# Altium PCB TXRobot-Boutons.PCBDOC
Units mm, origin at the board's own origin, x right, y up, seen from the top; angles counter-clockwise.
Board outline 299.72 x 199.9 mm, 2 copper layers (Top Layer, Bottom Layer); 21 components, 11 nets, 65 pads, 9 vias.
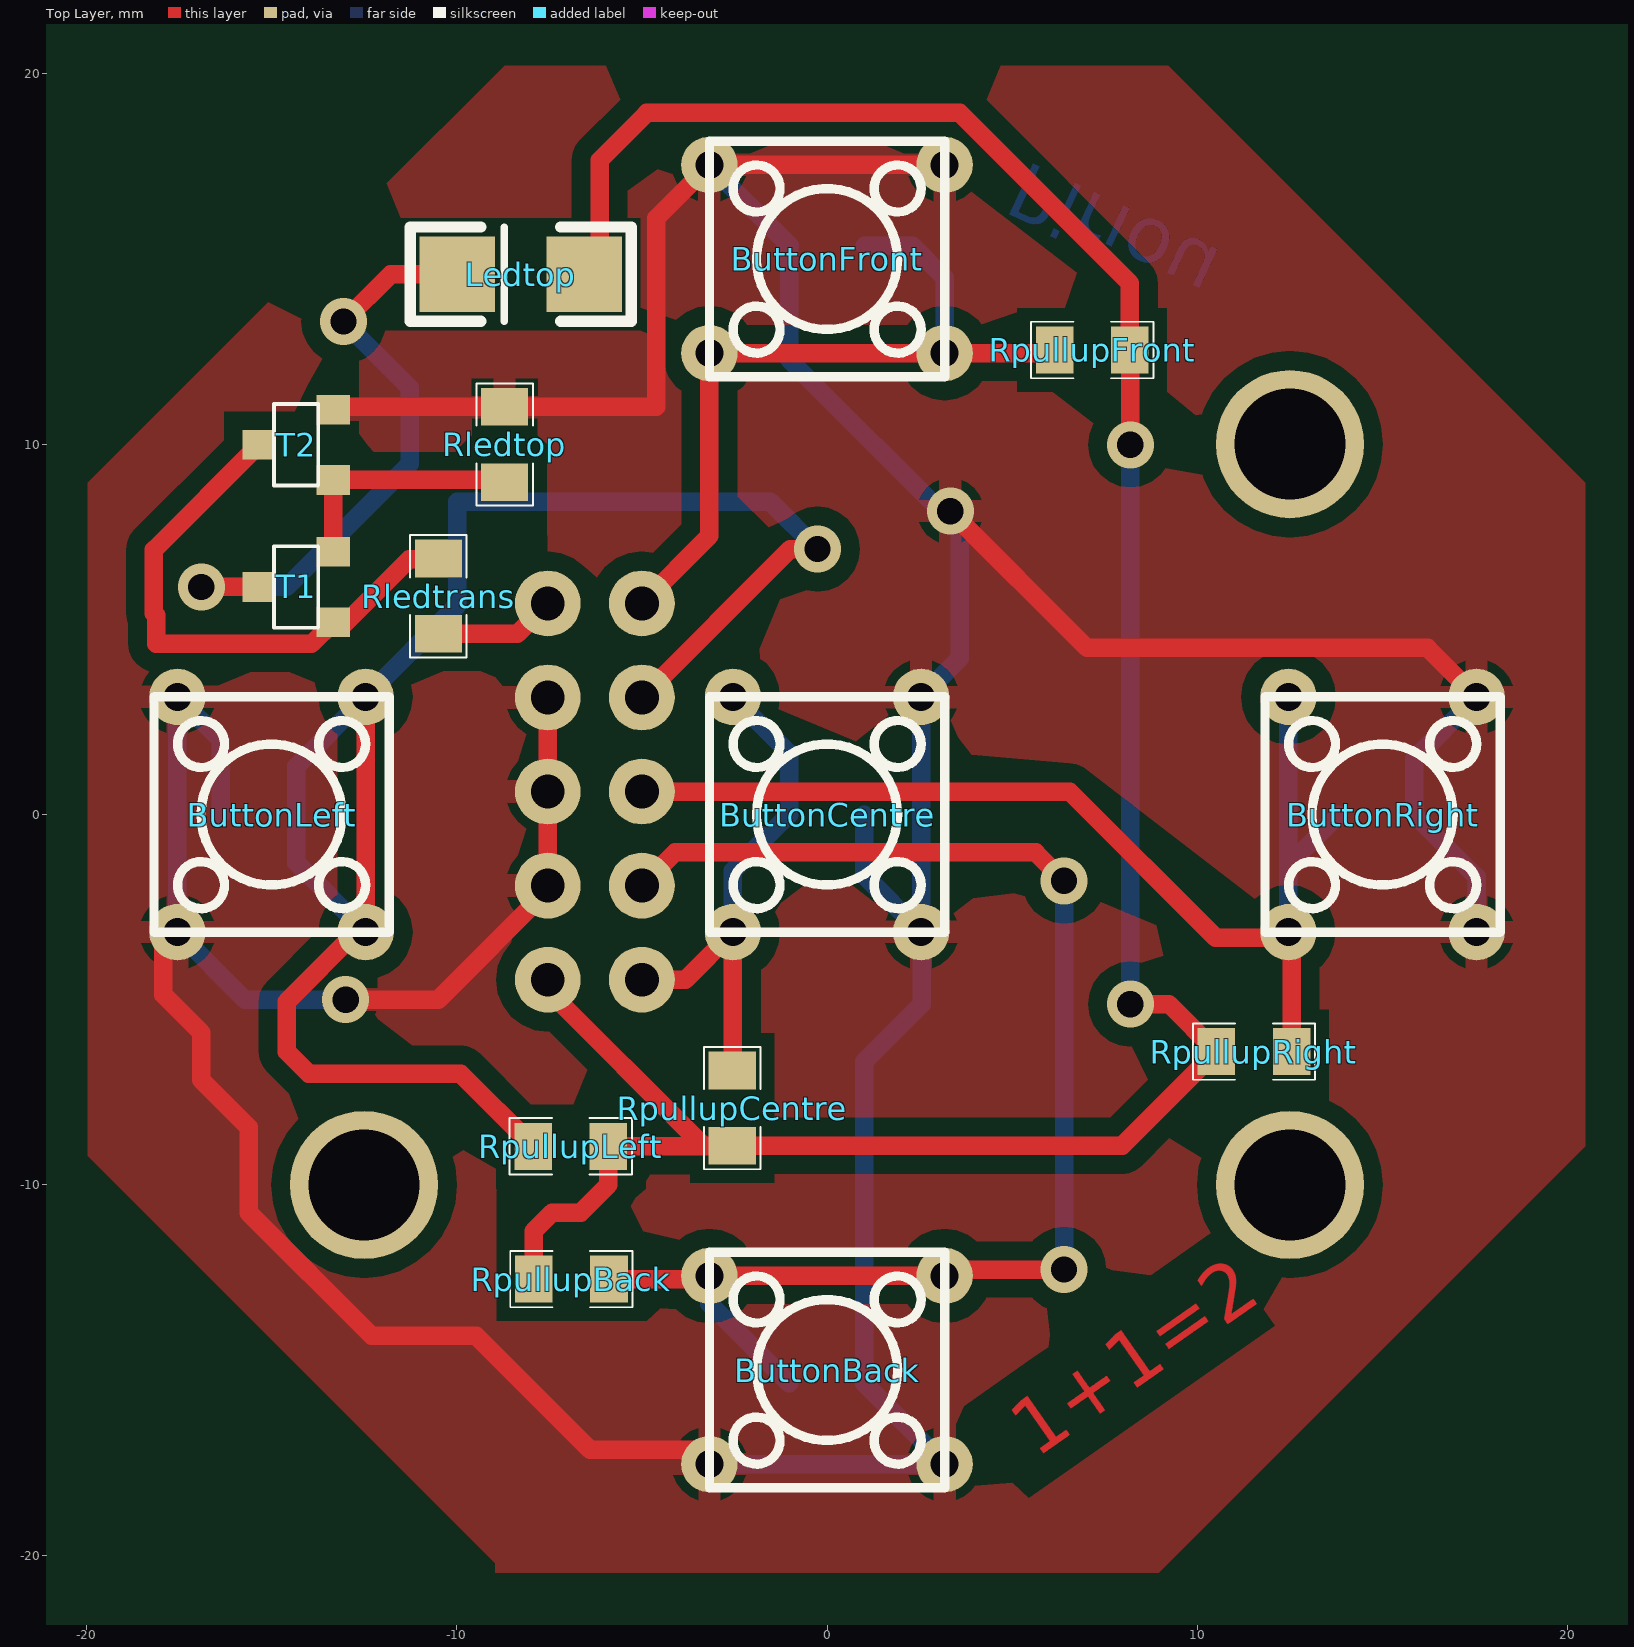
[diagram p0: Top Layer view]
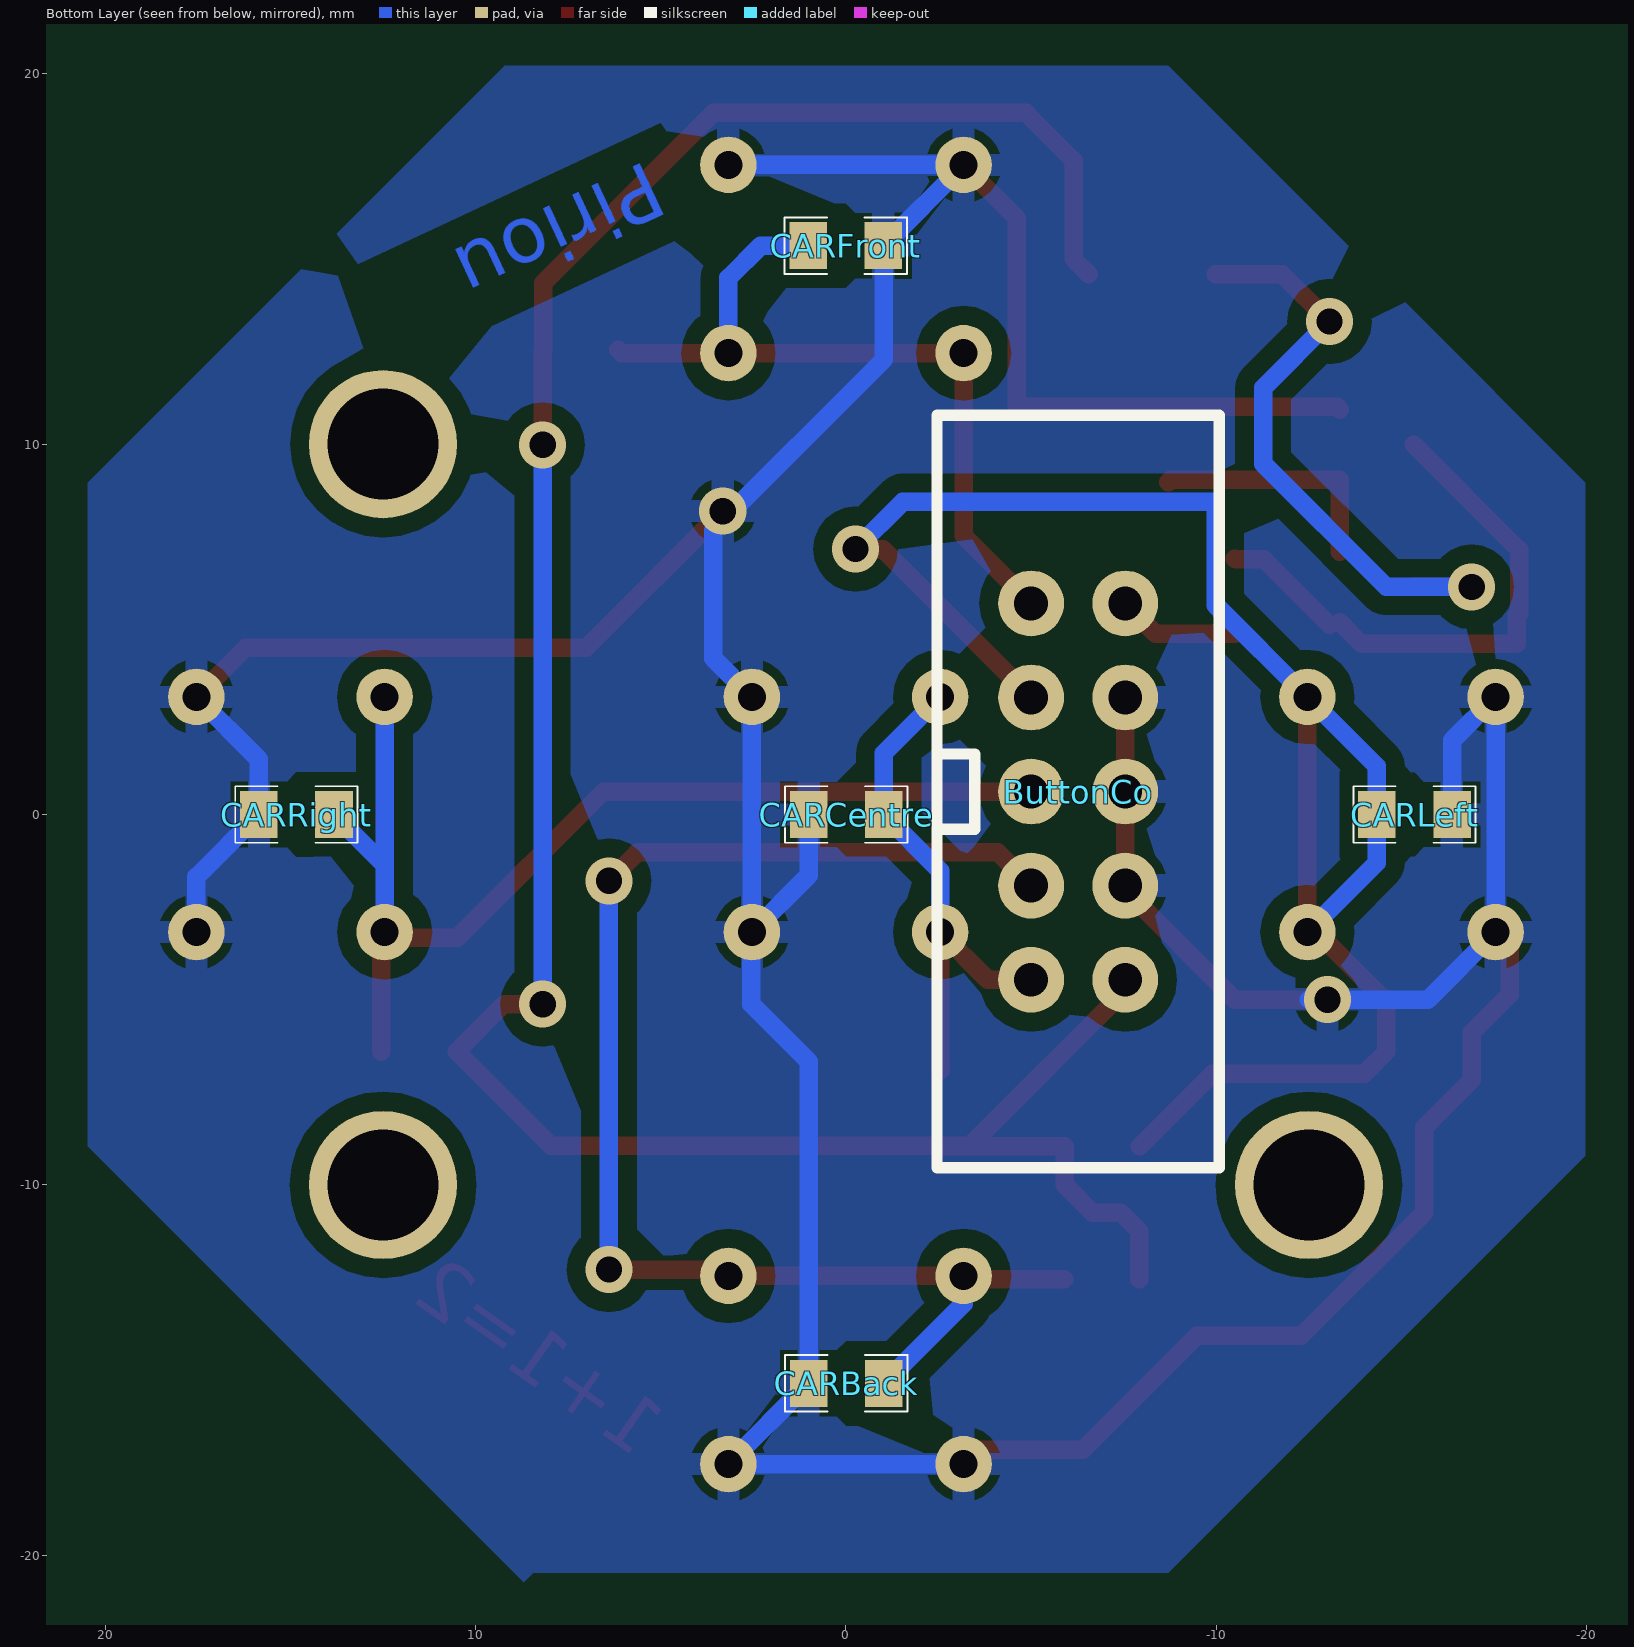
[diagram p1: Bottom Layer view, seen from below]

## Layer stack, top to bottom
Top Solder: solder mask 0.0102, Solder Resist, Dk 3.5
Top Layer: signal copper 0.0356
Dielectric1: dielectric 0.32, FR-4, Dk 4.8
Bottom Layer: signal copper 0.0356
Bottom Solder: solder mask 0.0102, Solder Resist, Dk 3.5

## Board outline
-141.655,-46.39 158.065,-46.39 158.065,153.508 -141.655,153.508

## Design rules (kind name [scope] priority, off if disabled: settings)
Clearance Clearance_bottom_polygon [OnLayer('Bottom Layer') Or OnLayer('Multi-Layer') vs OnLayer('Bottom Layer')  And  InPoly] p1: gap=0.508
Clearance Clearance_top_polygon [OnLayer('Top Layer')  Or OnLayer('Multi-Layer') vs OnLayer('Top Layer') And InPoly] p2: gap=0.508
Clearance Clearance_bottom [OnLayer('Bottom Layer') Or OnLayer('Multi-Layer') vs OnLayer('Bottom Layer')  And Not InPoly] p3: gap=0.203
Clearance Clearance_top [OnLayer('Top Layer')  Or OnLayer('Multi-Layer') vs OnLayer('Top Layer') And Not InPoly] p4: gap=0.203
Clearance Clearance_pad_to_pad [OnLayer('Multi-Layer') vs OnLayer('Multi-Layer')] p5: gap=0.254
ComponentClearance ComponentClearance_bottom [OnLayer('Bottom Overlay') vs OnLayer('Bottom Overlay')] p1: gap=0 collisioncheckmode=3 verticalgap=0.254 showdistances=FALSE
ComponentClearance ComponentClearance_top [OnLayer('Top Overlay') vs OnLayer('Top Overlay')] p2: gap=0 collisioncheckmode=3 verticalgap=0.254 showdistances=FALSE
FabricationTestPointUsage TestPointUsage [All] p1: valid=0 allowmultiple=FALSE
FabricationTestpoint Testpoint [All] p1: side=3 testpointundercomponent=TRUE minsize=1.016 maxsize=2.54 preferedsize=1.524 minholesize=0 maxholesize=1.016 preferedholesize=0.813 testpointgrid=0.025 allowsidetop=TRUE allowsidebottom=TRUE usegrid=TRUE gridtolerance=0
HoleSize [All] p1: absolutevalues=TRUE maxlimit=25.4 minlimit=0.406 maxpercent=80.000 minpercent=20.000
MinimumAnnularRing [PadXSize_AllLayers = PadYSize_AllLayers] p1: minimumring=0.254
PermittedLayers [All] p1: toplayerpermitted=TRUE bottomlayerpermitted=TRUE
PolygonConnect [All] p1: connectstyle=Relief reliefconductorwidth=0.61 reliefentries=4 polygonreliefangle="90 Angle" airgapwidth=0.254
RoutingVias [All] p1: holewidth=0.406 width=0.813 viastyle="Through Hole" minholewidth=0.4 minwidth=0.8 maxholewidth=0.6 maxwidth=10
SMDToPlane [All] p1: distance=0
SolderMaskExpansion [All] p1: expansion=0.102
ViasUnderSMD [All] p1: allowed=FALSE
Width Width_botom_top [OnLayer('Bottom Layer') or OnLayer('Top Layer')] p1: maxlimit=254 minlimit=0.5 preferedwidth=0.813 minimp=50.000000 maximp=50.000000 favimp=50.000000
25 further rules are at their usual default settings.

## Components (designator, comment, footprint, x,y, rotation, side; value= is the part's Value field where it differs from the comment)
ButtonBack "SwitchButton" SwitchMedium 0,-15 r0 top
ButtonCentre "SwitchButton" SwitchMedium 0,0 r90 top
ButtonCo "comment" HE10-10V -5,5.7 r180 bottom
ButtonFront "SwitchButton" SwitchMedium 0,15 r180 top
ButtonLeft "SwitchButton" SwitchMedium -15,0 r270 top
ButtonRight "SwitchButton" SwitchMedium 15,0 r90 top
CARBack "CAP" 0805 -1.024,-15.36 r0 bottom
CARCentre "CAP" 0805 -1.024,0 r0 bottom
CARFront "CAP" 0805 1.024,15.36 r180 bottom
CARLeft "CAP" 0805 -14.336,0 r180 bottom
CARRight "CAP" 0805 13.824,0 r0 bottom
Ledtop "comment" LED1206 -9.984,14.592 r0 top
Rledtop "RES" 0805 -8.704,11.008 r270 top
Rledtrans "RES" 0805 -10.496,6.912 r270 top
RpullupBack "RES" 0805 -5.888,-12.544 r180 top
RpullupCentre "RES" 0805 -2.56,-6.912 r270 top
RpullupFront "RES" 0805 6.144,12.544 r0 top
RpullupLeft "RES" 0805 -7.936,-8.96 r0 top
RpullupRight "RES" 0805 12.544,-6.4 r180 top
T1 "Transistors" BC817-40 -14.336,6.144 r270 top
T2 "Transistors" BC817-40 -14.336,9.984 r270 top

## Footprints (in the part's own frame and the unit in brackets; to place one, negate y for a bottom-side part, rotate by r counter-clockwise, add the part's x,y. Pads: shape width x height; smd on the part's side, far side on the other; paste and mask are expansions set on the pad)
0805 [mil]
  rect 40x50 smd: 1(0,0) 2(80,0)
  silkscreen extent -25,-30 105,30
BC817-40 [mm]
  rect 0.8x0.9 smd: 1(0.95,1) 2(-0.95,1) 3(0,-1)
  silkscreen extent -1.1,-0.6 1.1,0.6
HE10-10V [mil]
  round 70 hole 36: 1(0,0) 2(100,0) 3(0,-100) 4(100,-100) 5(0,-200) 6(100,-200) 7(0,-300) 8(100,-300) 9(0,-400) 10(100,-400)
  silkscreen extent -100,-600 200,200
LED1206 [mil]
  rect 80x80 smd: A(135,0) K(0,0)
  silkscreen extent -50,-50 185,50
SwitchMedium [mil]
  round 60 hole 30: 1(-125,100) 2(125,100) 3(125,-100) 4(-125,-100)
  silkscreen extent -125,-125 125,125

## Part data
ButtonCo: library part HE10-10, "10-pin connector"
CARBack CARCentre: "Capa anti rebond"
CARFront CARLeft CARRight: "capa Anti rebond"
Ledtop: library part LED, "LED 5mm/3mm/CMS"
Rledtop Rledtrans RpullupBack RpullupCentre RpullupFront RpullupLeft RpullupRight: "resistance"

## Free pads (board coordinates)
  round 4 hole 3: 0(-12.5,-10) 0(12.5,-10) 0(12.5,10)

## Via types
v1: diameter 1.27, hole 0.711, Top Layer to Bottom Layer, 9 vias

## Nets (pads, with @x,y where several pads share a name; then routed paths per layer and width w, separated by ;. In a path a pad name is that pad's centre, name@x,y a point inside that pad or via, vN(x,y) a via of type N, cw(c..) or ccw(c..) an arc to the next point about the centre after c; other vN are vias at no path point)
GND: ButtonBack.3 ButtonBack.4 ButtonCentre.3 ButtonCentre.4 ButtonCo.4 ButtonCo.6 ButtonCo.8 ButtonFront.3 ButtonFront.4 ButtonLeft.3 ButtonLeft.4 ButtonRight.3 ButtonRight.4 CARBack.2 CARCentre.2 CARFront.2 CARLeft.2 CARRight.2 Rledtop.1 T2.2 | length 154.3
  Top Layer w0.5: ButtonLeft.3 -17.92,-3.555 -17.92,-4.864 -16.896,-5.888 -16.896,-7.168 -15.616,-8.448 -15.616,-10.752 -12.288,-14.08 -9.472,-14.08 -6.4,-17.152 -3.563,-17.152 ButtonBack.4 ; T2.2 -13.262,11.008 Rledtop.1 -4.608,11.008 -4.608,16.107 ButtonFront.3 ButtonFront.4 ; v1(-13,-5) -10.5,-5 -7.54,-2.04 ButtonCo.6 ButtonCo.4 ; v1(3.328,8.192) 7.02,4.5 16.215,4.5 ButtonRight.3
  Bottom Layer w0.5: CARLeft.2 -16.368,2.003 ButtonLeft.4 ButtonLeft.3 -15.715,-5 v1@-12.5,-5 ; ButtonBack.4 ButtonBack.3 3.175,-17.527 CARBack.2 1.008,-6.672 2.56,-5.12 2.56,-3.195 ButtonCentre.4 ; CARCentre.2 1.008,-1.643 ButtonCentre.4 ; ButtonFront.4 ButtonFront.3 -3.175,17.527 CARFront.2 -1.024,15.344 -1.024,12.288 3.584,7.68 3.584,4.219 ButtonCentre.3 ButtonCentre.4 ; ButtonRight.4 17.54,-1.684 CARRight.2 15.856,1.491 ButtonRight.3
LED: ButtonCo.2 Rledtrans.2 | length 3.3
  Top Layer w0.5: Rledtrans.2 -8.36,4.88 ButtonCo.2
NetButtonBack_1: ButtonBack.1 ButtonBack.2 ButtonCo.7 CARBack.1 RpullupBack.1 | length 38.8
  Top Layer w0.5: RpullupBack.1 -3.259,-12.544 ButtonBack.1 ButtonBack.2 3.347,-12.288 v1(6.4,-12.288) ; ButtonCo.7 -4.104,-1.024 5.632,-1.024 v1(6.4,-1.792)
  Bottom Layer w0.5: ButtonBack.1 -3.175,-13.209 CARBack.1 ; v1(6.4,-12.288) v1(6.4,-1.792)
NetButtonCentre_1: ButtonCentre.1 ButtonCentre.2 ButtonCo.9 CARCentre.1 RpullupCentre.1 | length 14.3
  Top Layer w0.5: ButtonCo.9 -3.825,-4.46 ButtonCentre.1 -2.54,-6.892 RpullupCentre.1
  Bottom Layer w0.5: ButtonCentre.1 -2.54,-1.516 CARCentre.1 -1.024,1.659 ButtonCentre.2
NetButtonCo_1: ButtonCo.1 ButtonFront.1 ButtonFront.2 CARFront.1 RpullupFront.1 | length 21.4
  Top Layer w0.5: ButtonCo.1 -3.175,7.525 ButtonFront.2 ButtonFront.1 6.06,12.46 RpullupFront.1
  Bottom Layer w0.5: CARFront.1 2.304,15.36 3.175,14.489 ButtonFront.1
NetButtonCo_3: ButtonCo.3 ButtonLeft.1 ButtonLeft.2 CARLeft.1 RpullupLeft.1 | length 49.2
  Top Layer w0.5: ButtonLeft.1 ButtonLeft.2 -12.714,-3.175 -14.592,-5.053 -14.592,-6.4 -13.992,-7 -9.896,-7 RpullupLeft.1 ; ButtonCo.3 -0.992,7.168 v1(-0.256,7.168)
  Bottom Layer w0.5: ButtonLeft.2 -14.336,-1.299 CARLeft.1 -14.336,1.299 ButtonLeft.1 -9.984,5.651 -9.984,8.448 -1.536,8.448 v1(-0.256,7.168)
NetButtonCo_5: ButtonCo.5 ButtonRight.1 ButtonRight.2 CARRight.1 RpullupRight.1 | length 30.7
  Top Layer w0.5: ButtonCo.5 6.548,0.62 10.496,-3.328 12.307,-3.328 ButtonRight.1 12.544,-3.259 RpullupRight.1
  Bottom Layer w0.5: ButtonRight.1 12.46,-1.364 ; ButtonRight.2 12.46,-1.364 ; CARRight.1 12.46,-1.364
NetLedtop_K: Ledtop.K T1.3 | length 16.8
  Top Layer w0.5: v1(-16.896,6.144) T1.3 ; v1(-13.056,13.312) -11.776,14.592 Ledtop.K
  Bottom Layer w0.5: v1(-16.896,6.144) -14.592,6.144 -11.264,9.472 -11.264,11.52 v1(-13.056,13.312)
NetRledtop_2: Rledtop.2 T1.2 T2.1 | length 6.6
  Top Layer w0.5: T1.2 T2.1 -8.762,9.034 Rledtop.2
NetRledtrans_1: Rledtrans.1 T1.1 T2.3 | length 14.9
  Top Layer w0.5: T2.3 -18.176,7.144 -18.176,5.44 -18.112,5.376 -18.112,4.608 -13.922,4.608 T1.1 ; T1.1@-13.056,5.12 -11.288,6.888 -10.52,6.888 Rledtrans.1
VCC5V: ButtonCo.10 Ledtop.A RpullupBack.2 RpullupCentre.2 RpullupFront.2 RpullupLeft.2 RpullupRight.2 | length 71.9
  Top Layer w0.5: RpullupBack.2 -7.92,-11.248 -7.424,-10.752 -6.656,-10.752 -5.904,-10 RpullupLeft.2 -2.576,-8.96 RpullupCentre.2 ; ButtonCo.10@-7.92,-4.84 -7.684,-4.604 -3.344,-8.944 RpullupCentre.2 ; Ledtop.A -6.144,15.003 -6.144,17.664 -4.864,18.944 3.584,18.944 8.176,14.352 RpullupFront.2 8.192,12.528 v1(8.192,9.984) ; v1(8.192,-5.12) 9.232,-5.12 RpullupRight.2 7.968,-8.944 RpullupCentre.2
  Bottom Layer w0.5: v1(8.192,-5.12) v1(8.192,9.984)

## Polygon pours and split planes (outlines as drawn)
GND on Top Layer "Top Layer-No Net" (solid, pour order 10): -19.968,0 -19.968,8.96 -8.96,19.968 -8.704,20.224 8.96,20.224 9.216,20.224 20.48,8.96 20.48,-8.96 8.96,-20.48 -8.96,-20.48 -8.96,-20.224 -19.968,-9.216 -19.968,-0.256 -19.968,0 -20.224,0.256
GND on Bottom Layer "Top Layer-No Net" (solid, pour order 12): -19.968,-9.216 -19.968,8.96 -8.96,19.968 -8.704,20.224 9.216,20.224 20.48,8.96 20.48,-8.96 8.704,-20.736 8.448,-20.48 -8.704,-20.48 -19.968,-9.216

## Keep-outs
Keep-Out Layer:
  rectangle: -135.695,152.27 149.305,157.27
  rectangle: 149.305,-37.73 154.305,157.27
  rectangle: -135.695,-42.73 154.305,-37.73
  rectangle: -140.695,-42.73 -135.695,157.27

## Other copper
Top Layer:
  text "1+1=2" at 5.632,-17.408 h1.52 r35
Bottom Layer:
  text "Piriou" at 5.376,17.664 h1.52 r155

## Silkscreen, mask and mechanical layers (free items; w line width, h text height)
Top Overlay:
  text "Les bandes en violet delimitent la surface utilisable...." at -144.907,179.832 h6.35
  text "Mais vous n'etes pas obliges de tout utiliser!!" at -128.651,169.545 h6.35
Mechanical 1:
  circle w0.3: c0,0.1 r20